# Altium PCB FIT_PM_Dual_Range_AFE.PcbDoc (part 14 of 17)
Units mm, origin at the board's own origin, x right, y up, seen from the top; angles counter-clockwise.
Board outline 259 x 114 mm, 8 copper layers (Top Layer, Mid-Layer 1, Mid-Layer 2, Layer 1, Layer 2, Mid-Layer 3, Mid-Layer 4, Bottom Layer), stack 1.616 mm thick; 963 components, 806 nets, 4757 pads, 2208 vias.
Unrouted connection lines stored in the file: 682.
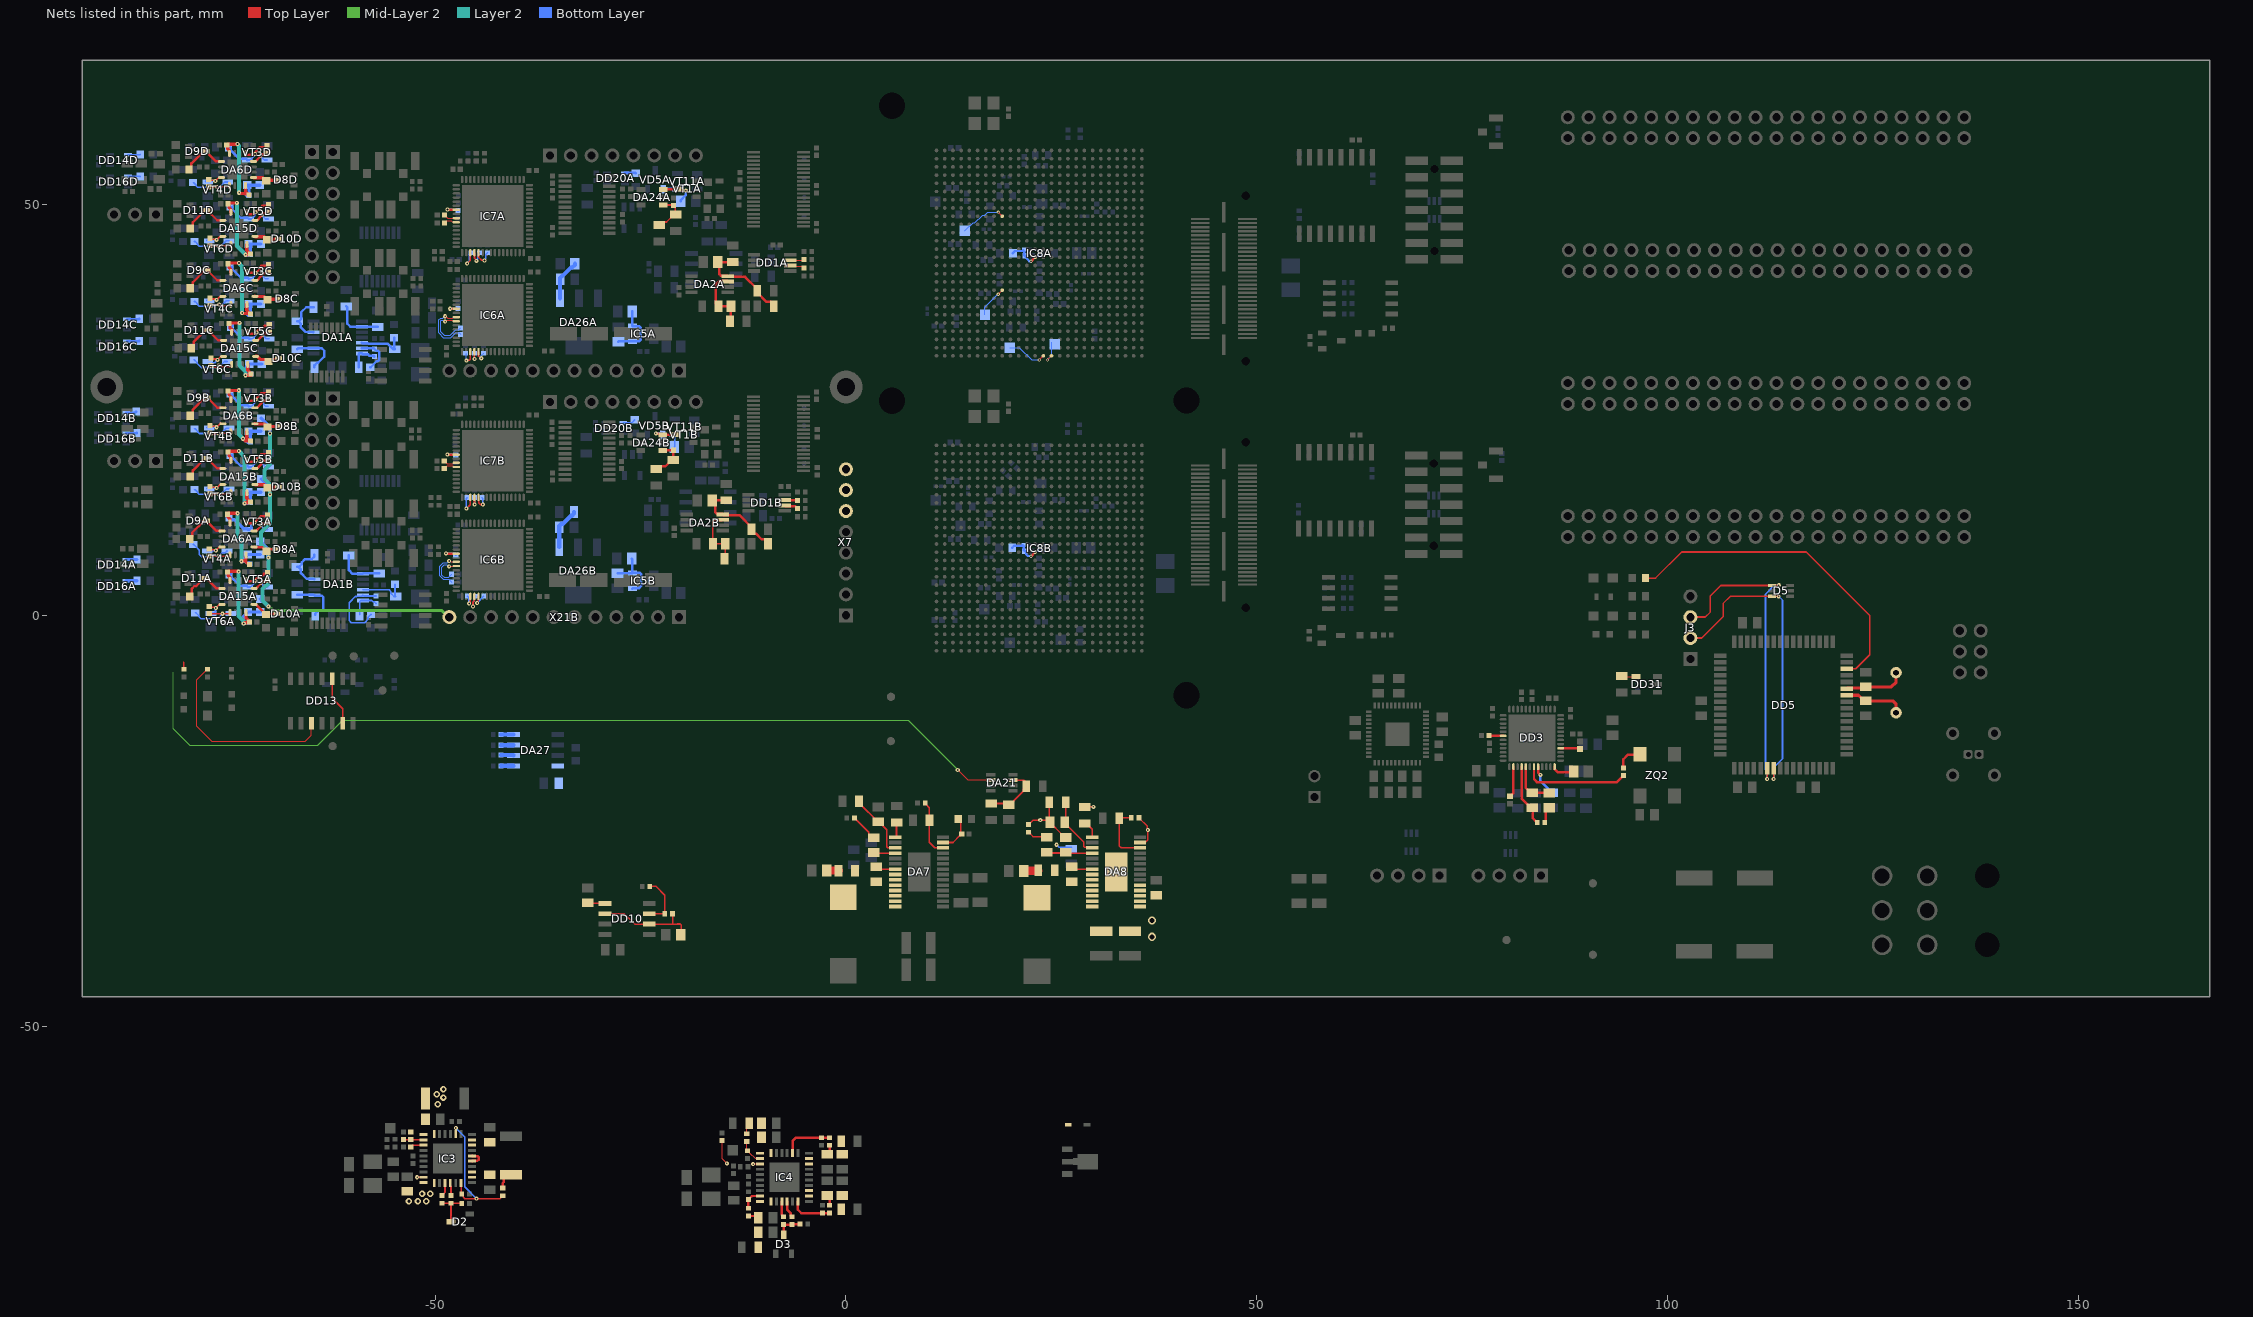
[diagram p16: the nets of this part, all layers, seen from the top]

## Via types
v1: diameter 0.5, hole 0.2, Top Layer to Bottom Layer, tented both sides, 1234 vias
v2: diameter 0.4, hole 0.2, Top Layer to Bottom Layer, tented both sides, 876 vias
v3: diameter 1, hole 0.6, Top Layer to Bottom Layer, tented both sides, 74 vias
v4: diameter 0.8, hole 0.4, Top Layer to Bottom Layer, tented both sides, 15 vias
v5: diameter 0.5, hole 0.2, Top Layer to Bottom Layer, 9 vias

## Nets (pads, with @x,y where several pads share a name; then routed paths per layer and width w, separated by ;. In a path a pad name is that pad's centre, name@x,y a point inside that pad or via, vN(x,y) a via of type N, cw(c..) or ccw(c..) an arc to the next point about the centre after c; other vN are vias at no path point) (continued)
LED_PSU_Fail: DD13.3 R113.1 | length 24
  Top Layer w0.15: R113.1@-77.697,-6.534 -77.932,-6.769 -77.937,-6.769 -78.997,-7.829 -78.997,-13.524 -77.197,-15.324 -65.797,-15.324 -65.067,-14.594 DD13.3@-65.067,-13.124
LED_PWRIN_OK: DA21.2 R114.1 | length 112.4
  Top Layer w0.15: v1(13.603,-18.824) 14.803,-20.024 17.595,-20.024 DA21.2@17.621,-20.051
  Top Layer w0.2: R114.1@-80.597,-6.674 R114.1@-80.597,-6.554 -80.597,-5.711 -80.593,-5.707
  Mid-Layer 2 w0.15: -81.897,-7.012 -81.897,-13.824 -79.897,-15.824 -64.276,-15.824 -61.247,-12.794 7.573,-12.794 v1(13.603,-18.824)
LED_SYS_FAIL: DD5.62 R146.1 | length 39.9
  Top Layer w0.2: R146.1@97.519,4.536 98.545,4.536 101.724,7.714 116.891,7.714 124.619,-0.014 124.619,-4.814 122.919,-6.514 DD5.62@121.819,-6.514
MCU_Console_Rx: D5.1 DD5.38 J3.3 | length 39.5
  Top Layer w0.2: J3.3@102.779,-0.225 102.801,-0.204 104.604,-0.204 105.219,0.411 105.219,2.386 106.469,3.636 D5.1@112.719,3.636 112.734,3.651 113.535,3.651 v1(113.55,3.666) ; v1(112.119,-19.914) DD5.38@112.119,-18.614
  Bottom Layer w0.2: v1(112.119,-19.914) 112.119,-19.014 111.919,-18.814 111.919,2.586 112.999,3.666 v1(113.55,3.666)
MCU_Console_Tx: D5.3 DD5.39 J3.2 | length 37.9
  Top Layer w0.2: J3.2@102.779,-2.765 104.168,-2.765 106.763,-0.17 106.763,1.43 107.669,2.336 D5.3@112.719,2.336 113.509,2.336 v1(113.519,2.326) ; v1@112.919,-19.814 DD5.39@112.919,-18.614
  Bottom Layer w0.2: v1(112.919,-19.914) 112.919,-18.514 113.986,-17.447 113.986,1.859 v1(113.519,2.326)
N5V0_CFDA: L26C.2 L26D.2 L30C.2 L30D.2 X21A.12 | length 55.3
  Mid-Layer 2 w0.4: v1(-70,30.1) -69.078,30.1 -68.928,29.95 -68.472,29.95 -68.322,30.1 -54.9,30.1 -54.58,29.78 X21A.12@-48.28,29.78
  Layer 2 w0.5: v1(-70.2,52.096) -70.2,48.7 -70.9,48 -70.9,46.9 -70.3,46.3 v1(-70.3,44.929) -70.3,41.3 -70.9,40.7 -70.9,39.3 -70.1,38.5 v1(-70.1,37.629) -70.1,34.1 -70.8,33.4 -70.8,32.2 -70,31.4 v1(-70,30.1)
  Bottom Layer w0.4: L26D.2@-71.368,53.968 -71.343,53.968 -70.2,52.825 v1@-70.2,52.1 ; L26C.2@-71.2,39.5 -71.175,39.5 -70.1,38.425 v1(-70.1,37.629) ; L30D.2@-71.2,46.8 -71.175,46.8 -70.3,45.925 v1(-70.3,44.929) ; L30C.2@-71.1,32.2 -71.075,32.2 -70,31.125 v1(-70,30.1)
N5V0_CFDA: L26A.2 L26B.2 L30A.2 L30B.2 X21B.12 | length 54
  Mid-Layer 2 w0.4: v1(-70.3,1.1) -69.794,0.594 -49.233,0.594 -48.419,-0.22 X21B.12@-48.28,-0.22
  Layer 2 w0.5: v1(-70.3,1.1) -71,1.8 -71,3.2 -70.3,3.9 v1(-70.3,7.025) -70.3,7.8 -71.2,8.7 -71.2,10.1 -70.1,11.2 v1(-70.1,14.729) -70.1,15.9 -70.8,16.6 -70.8,17.7 -70.1,18.4 v1(-70.1,22.129)
  Bottom Layer w0.4: L26A.2@-71.306,9 -71.281,9 -70.4,8.119 -70.4,7.125 v1(-70.3,7.025) ; L30A.2@-71.3,2 -71.275,2 -70.394,1.119 -70.319,1.119 v1(-70.3,1.1) ; L30B.2@-71.2,16.6 -71.175,16.6 -70.1,15.525 v1(-70.1,14.729) ; L26B.2@-71.2,24 -71.175,24 -70.1,22.925 v1(-70.1,22.129)
N5V0_CFDA1A: C91A.2 C138A.2 C291A.2 C306A.2 DA6A.4 DA6A.12 L26A.1 | length 13.8
  Top Layer w0.4: DA6A.4@-74.975,11.25 -74.975,11.697 -75.188,11.91 -75.188,11.956 -75.19,11.957 -75.19,12.19 C91A.2@-75.3,12.3 -75.19,12.41 -74.065,12.41 v1(-74.05,12.425) ; v1(-73.597,6.581) -73.578,6.6 -73.507,6.6 -73.482,6.625 -73.25,6.625 -73.025,6.85 DA6A.12@-73.025,7.125 ; -73.129,6.55 -73.072,6.55 -72.832,6.31 -72.71,6.31 C291A.2@-72.6,6.2
  Layer 2 w0.5: v1(-74.05,12.425) -74.05,9.35 -73.597,8.897 v1(-73.597,6.581)
  Bottom Layer w0.4: v1(-73.597,6.581) -73.57,6.581 -73.539,6.55 -73.072,6.55 -72.847,6.325 -72.65,6.325 C138A.2@-72.55,6.225 ; -73.231,6.619 -73.231,6.69 -73.202,6.719 -73.202,7.048 -72.85,7.4 L26A.1@-71.306,7.4
N5V0_CFDA1B: C91B.2 C138B.2 C291B.2 C306B.2 DA6B.4 DA6B.12 L26B.1 | length 14.7
  Top Layer w0.4: DA6B.4@-74.875,26.25 -74.875,26.606 -75.088,26.819 -75.088,26.956 -75.09,26.958 -75.09,27.19 C91B.2@-75.2,27.3 -75.119,27.381 -73.919,27.381 v1(-73.9,27.4) ; v1(-73.4,21.5) -73.153,21.253 C291B.2@-72.553,21.253 ; DA6B.12@-72.925,22.35 -72.925,21.625 C291B.2@-72.5,21.2
  Layer 2 w0.5: v1(-73.9,27.4) -73.9,22 v1(-73.4,21.5)
  Bottom Layer w0.4: v1(-73.4,21.5) -73.373,21.5 -73.123,21.25 -72.972,21.25 -72.751,21.029 C138B.2@-72.7,21.029 ; C306B.2@-72.725,22.4 -72.5,22.175 C138B.2@-72.5,21.129 ; C306B.2@-72.7,22.4 L26B.1@-71.2,22.4
N5V0_CFDA1C: C91C.2 C138C.2 C291C.2 C306C.2 DA6C.4 DA6C.12 L26C.1 | length 14.9
  Top Layer w0.4: DA6C.4@-74.875,41.75 -74.875,42.106 -75.088,42.319 -75.088,42.456 -75.09,42.458 -75.09,42.69 C91C.2@-75.2,42.8 -75.119,42.881 v1(-73.881,42.881) ; v1(-73.5,36.8) -73.473,36.8 -73.423,36.75 -72.55,36.75 C291C.2@-72.5,36.7 -72.925,37.125 DA6C.12@-72.925,37.85
  Layer 2 w0.5: v1(-73.881,42.881) -73.881,42.854 -73.5,42.473 v1(-73.5,36.8)
  Bottom Layer w0.4: v1(-73.5,36.8) -73.473,36.8 -73.423,36.75 -72.972,36.75 -72.751,36.529 C138C.2@-72.7,36.529 ; C306C.2@-72.725,37.9 -72.5,37.675 C138C.2@-72.5,36.629 ; C306C.2@-72.7,37.9 L26C.1@-71.2,37.9
N5V0_CFDA1D: C91D.2 C138D.2 C291D.2 C306D.2 DA6D.4 DA6D.12 L26D.1 | length 15.2
  Top Layer w0.4: DA6D.4@-75.043,56.218 -75.043,56.574 -75.256,56.787 -75.256,56.924 -75.258,56.926 -75.258,57.158 C91D.2@-75.368,57.268 -75.287,57.349 -74.087,57.349 v1(-74.068,57.368) ; v1(-73.86,51.44) -73.833,51.44 -73.743,51.35 -73.172,51.35 -73.1,51.278 -72.778,51.278 C291D.2@-72.668,51.168 -73.093,51.593 DA6D.12@-73.093,52.318
  Layer 2 w0.5: v1(-74.068,57.368) -74.068,57.341 -73.86,57.133 v1(-73.86,51.44)
  Bottom Layer w0.4: v1(-73.86,51.44) -73.833,51.44 -73.743,51.35 -73.172,51.35 -72.868,51.046 C138D.2@-72.868,50.996 ; C306D.2@-72.893,52.368 -72.668,52.143 C138D.2@-72.668,51.096 ; C306D.2@-72.868,52.368 L26D.1@-71.368,52.368
N5V0_CFDA2A: C93A.2 C140A.2 C287A.2 C310A.2 DA15A.4 DA15A.12 L30A.1 | length 15.2
  Top Layer w0.4: DA15A.4@-74.975,4.25 -74.975,4.606 -75.188,4.819 -75.188,4.956 -75.19,4.958 -75.19,5.19 C93A.2@-75.3,5.3 -75.219,5.381 -74.008,5.381 -73.953,5.326 v1(-73.926,5.326) ; v1(-73.3,-1) -73.273,-1 -73.183,-0.91 -72.71,-0.91 C287A.2@-72.6,-0.8 -73.025,-0.375 DA15A.12@-73.025,0.35
  Layer 2 w0.5: v1(-73.926,5.326) -73.926,-0.074 -73.319,-0.681 -73.319,-0.981 v1(-73.3,-1)
  Bottom Layer w0.4: C140A.2@-72.65,-0.8 -72.76,-0.91 -73.183,-0.91 -73.273,-1 v1(-73.3,-1) -73.3,-0.1 -73.1,0.1 -73.1,0.125 -72.825,0.4 C310A.2@-72.8,0.4 L30A.1@-71.3,0.4
N5V0_CFDA2B: C93B.2 C140B.2 C287B.2 C310B.2 DA15B.4 DA15B.12 L30B.1 | length 14.6
  Top Layer w0.4: DA15B.4@-74.875,18.85 -74.875,19.206 -75.088,19.419 -75.088,19.556 -75.09,19.558 -75.09,19.79 C287B.2@-75.2,19.9 -75.119,19.981 -73.919,19.981 v1(-73.9,20) ; v1(-73.2,13.629) -73.173,13.629 -73.107,13.695 -72.605,13.695 C93B.2@-72.5,13.8 -72.925,14.225 DA15B.12@-72.925,14.95
  Layer 2 w0.5: v1(-73.9,20) -73.2,19.3 v1(-73.2,13.629)
  Bottom Layer w0.4: v1(-73.2,13.629) C140B.2@-72.7,13.629 ; C310B.2@-72.725,15 -72.5,14.775 C140B.2@-72.5,13.729 ; C310B.2@-72.7,15 L30B.1@-71.2,15
N5V0_CFDA2C: C93C.2 C140C.2 C287C.2 C310C.2 DA15C.4 DA15C.12 L30C.1 | length 15.1
  Top Layer w0.4: DA15C.4@-74.775,34.45 -74.775,34.806 -74.988,35.019 -74.988,35.156 -74.99,35.158 -74.99,35.39 C93C.2@-75.1,35.5 -75.019,35.581 -73.819,35.581 v1(-73.8,35.6) ; v1(-73.091,29.23) C287C.2@-72.4,29.23 ; DA15C.12@-72.825,30.55 -72.825,29.825 C287C.2@-72.4,29.4
  Layer 2 w0.5: v1(-73.8,35.6) -73.8,30.4 -73.11,29.71 -73.11,29.249 v1(-73.091,29.23)
  Bottom Layer w0.4: C140C.2@-72.4,29.4 -72.51,29.29 -73.003,29.29 -73.064,29.23 v1(-73.091,29.23) -73.091,30.109 -72.925,30.275 -72.925,30.325 -72.65,30.6 C310C.2@-72.625,30.6 L30C.1@-71.1,30.6
N5V0_CFDA2D: C93D.2 C140D.2 C287D.2 C310D.2 DA15D.4 DA15D.12 L30D.1 | length 14.2
  Top Layer w0.4: DA15D.4@-74.875,49.05 -74.875,49.406 -75.088,49.619 -75.088,49.756 -75.09,49.758 -75.09,49.99 C93D.2@-75.2,50.1 -75.119,50.181 -74.166,50.181 v1(-74.147,50.2) ; v1(-73.081,43.895) -72.605,43.895 C287D.2@-72.5,44 -72.925,44.425 DA15D.12@-72.925,45.15
  Layer 2 w0.5: v1(-74.147,50.2) -74.147,44.962 v1(-73.081,43.895)
  Bottom Layer w0.4: v1(-73.081,43.895) -73.053,43.895 -72.987,43.829 C140D.2@-72.7,43.829 ; C310D.2@-72.725,45.2 -72.5,44.975 C140D.2@-72.5,43.929 ; C310D.2@-72.7,45.2 L30D.1@-71.2,45.2
N5V5: C136.2 C145.2 C146.2 C149.1 C150.1 C151.1 DA8.1 DA8.2 DA8.3 DA8.4 DA8.5 DA8.13 DA8.29 R68.1 R69.1 R70.1 R72.1 X7.6 X7.7 X7.8 | length 15.3
  Top Layer w0.2: R69.1@22.22,-25.457 22.24,-25.457 22.768,-24.929 v1(23.644,-24.929) 24.544,-24.929 26.544,-26.929 C150.1@26.744,-26.929 ; C151.1@24.744,-25.029 R68.1@24.744,-22.729 ; R72.1@29.044,-23.329 29.06,-23.312 v1(30.111,-23.312) ; DA8.13@35.644,-27.649 DA8.13@35.794,-27.649 36.444,-27.649 36.744,-27.349 v1(36.744,-26.129) 36.691,-26.075 36.691,-25.675 35.675,-24.659 R70.1@35.675,-24.639
  Bottom Layer w0.2: v1(25.644,-27.929) 25.964,-28.249 C149.1@27.444,-28.249
  other v3: 37.244,-39.129 37.244,-37.129
NetC1A_2: C1A.2 DA2A.3 R2A.2 R9A.2 | length 7.8
  Top Layer w0.3: DA2A.3@-14.4,40.625 -14.475,40.7 -15.4,40.7 -15.825,40.275 -15.825,37.925 R2A.2@-15.5,37.6 C1A.2@-14,37.6 -14,35.9 R9A.2@-14.1,35.8
NetC1B_2: C1B.2 DA2B.3 R2B.2 R9B.2 | length 7.3
  Top Layer w0.2: DA2B.3@-15,11.625 -15.125,11.5 -16.083,11.5 -16.2,11.383 R2B.2@-16.2,8.7 C1B.2@-14.7,8.7 -14.7,7 R9B.2@-14.8,6.9
NetC3A_2: C3A.2 IC6A.23 | length 1.7
  Top Layer w0.3: v1(-48.188,37.312) -48.181,37.306 IC6A.23@-47.427,37.306
  Bottom Layer w0.3: v1(-48.188,37.312) -48.182,37.318 -47.244,37.318 C3A.2@-47.226,37.335
NetC3B_2: C3B.2 IC6B.23 | length 2.5
  Top Layer w0.3: v1(-48.683,7.543) -48.646,7.506 IC6B.23@-47.427,7.506
  Bottom Layer w0.3: v1(-48.683,7.543) -48.645,7.505 -47.655,7.505 C3B.2@-47.5,7.35
NetC5A_2: C5A.2 IC6A.25 | length 7.3
  Top Layer w0.15: v1(-48.793,36.409) -48.698,36.409 -48.468,36.179 -47.89,36.179 -47.763,36.306 IC6A.25@-47.427,36.306
  Bottom Layer w0.15: v1(-48.793,36.409) -48.836,36.409 -49.055,36.19 -49.341,36.19 -49.576,35.954 -49.576,34.376 -49,33.8 -48.097,33.8 -47.497,34.4 -47.1,34.4 C5A.2@-46.9,34.2
NetC5B_2: C5B.2 IC6B.25 | length 5.2
  Top Layer w0.15: v1(-48.301,6.614) -48.206,6.614 -48.127,6.535 -47.456,6.535 IC6B.25@-47.427,6.506
  Bottom Layer w0.145: v1(-48.301,6.614) -48.367,6.614 -48.563,6.418 -48.991,6.418 -49.429,5.98 -49.429,4.8 -49.02,4.391 -48.326,4.391 C5B.2@-47.993,4.057
NetC6_1: C6.1 ZQ2.3 | length 3.2
  Top Layer w0.3: C6.1@94.664,-18.393 94.62,-18.349 94.62,-17.51 95.143,-16.988 96.576,-16.988 ZQ2.3@96.668,-16.895
NetC6_2: C6.2 DD3.43 | length 12.9
  Top Layer w0.3: DD3.43@83.749,-18.421 83.749,-19.944 84.096,-20.291 93.844,-20.291 C6.2@94.639,-19.495
NetC7A_2: C7A.2 IC6A.26 | length 6.4
  Top Layer w0.15: v1(-48.793,35.757) -48.698,35.757 -48.534,35.92 -47.883,35.92 -47.768,35.806 IC6A.26@-47.427,35.806
  Bottom Layer w0.15: v1(-48.793,35.757) -48.873,35.757 -49.055,35.939 -49.238,35.939 -49.326,35.851 -49.326,34.538 -48.888,34.1 -48.15,34.1 -47.485,34.765 -47.135,34.765 C7A.2@-46.9,35
NetC7B_2: C7B.2 IC6B.26 | length 4.4
  Top Layer w0.15: v1(-48.301,5.962) -48.279,5.984 -47.45,5.984 IC6B.26@-47.427,6.006
  Bottom Layer w0.145: v1(-48.301,5.962) -48.38,5.962 -48.573,6.155 -48.888,6.155 -49.181,5.862 -49.181,4.898 -48.919,4.636 -48.358,4.636 -48.237,4.757 -48.237,4.763 -48.006,4.994 C7B.2@-48,4.994
NetC12_2: C12.2 DD10.2 DD10.6 R66.1 | length 12.1
  Top Layer w0.2: DD10.6@-29.141,-36.311 -26.991,-36.311 -25.721,-37.581 -24.141,-37.581 -21.086,-37.581 ; R66.1@-21.086,-36.275 -21.086,-37.581 ; -20.555,-37.581 -21.086,-37.581 ; -20.555,-37.578 -20.158,-37.578 -20.041,-37.695 C12.2@-20.041,-38.841
NetC21_2: C21.2 C22.2 IC3.8 IC3.9 IC3.14 IC3.15 R37.1 R40.2 | length 2.3
  Top Layer w0.3: R40.2@-41.781,-69.714 -41.781,-69.114 -41.63,-68.963 -41.63,-68.539 -41.205,-68.114 R37.1@-40.781,-68.114
NetC23_2: C23.2 C29.2 IC3.1 IC3.22 IC3.23 IC3.32 R52.1 R56.2
  other v4: -53.2,-71.3 -52.1,-71.3 -51.1,-71.3 -51.6,-70.4 -50.6,-70.4 -49.7,-59.5 -49,-58.7 -49.8,-58.3 -49,-57.7
NetC24_2: C24.2 DD3.48 | length 2.8
  Top Layer w0.3: DD3.48@86.249,-18.421 86.249,-18.696 86.674,-19.121 C24.2@88.575,-19.121
NetC25_2: C25.2 DD3.38 | length 3.8
  Top Layer w0.3: C25.2@80.819,-22.062 80.819,-22.015 81.022,-21.812 81.069,-21.812 81.249,-21.632 DD3.38@81.249,-18.421
NetC26_2: C26.2 DD3.4 | length 2.4
  Top Layer w0.3: DD3.4@86.999,-16.171 C26.2@89.384,-16.171
NetC27_1: C27.1 C28.1 DD3.41 | length 5.7
  Top Layer w0.3: DD3.41@82.749,-18.421 82.749,-21.003 82.965,-21.219 82.965,-21.226 83.34,-21.601 C28.1@83.515,-21.601 85.579,-21.601 C27.1@85.604,-21.626
NetC27_2: C27.2 R27.1 | length 1.8
  Top Layer w0.3: R27.1@85.182,-25.057 85.182,-23.849 C27.2@85.604,-23.426
NetC28_2: C28.2 DD3.40 R27.2 | length 7.7
  Top Layer w0.3: DD3.40@82.249,-18.421 82.249,-22.31 83.34,-23.401 C28.2@83.515,-23.401 83.591,-23.477 83.591,-24.679 83.986,-25.073 83.988,-25.073 84.128,-25.213 R27.2@84.128,-25.233
NetC43_2: C43.2 DD3.44 | length 4
  Top Layer w0.3: DD3.44@84.249,-18.421 84.249,-19.144 v1(84.519,-19.414)
  Bottom Layer w0.3: v1(84.519,-19.414) 84.519,-20.142 85.444,-21.067 85.444,-21.242 85.819,-21.617 C43.2@85.994,-21.617
NetC44_2: C44.2 IC3.25 | length 1.6
  Top Layer w0.2: C44.2@-52.981,-64.714 -52.756,-64.489 IC3.25@-51.44,-64.489
NetC46A_1: C46A.1 DA6A.1 R13A.2 VT3A.3 | length 7.4
  Top Layer w0.3: DA6A.1@-73.025,11.252 -73.025,11.223 -73.002,11.2 -72.154,11.2 -72.054,11.3 v1(-72,11.3) -71.26,12.04 -70.56,12.04 C46A.1@-70.4,12.2
  Bottom Layer w0.4: R13A.2@-75.1,11.9 -75.1,11.851 -74.875,11.626 -74.401,11.626 -73.325,10.55 -72.9,10.55 VT3A.3@-72.8,10.45 -72.45,10.45 -72.35,10.55 -72.35,10.95 v1(-72,11.3)
NetC46A_2: C46A.2 DA6A.16 VT3A.2 | length 3.2
  Top Layer w0.3: DA6A.16@-72.05,10.275 -71.814,10.275 -71.238,10.85 -71.238,10.962 v1(-71.2,11) -71.146,11 -71.006,11.14 -70.56,11.14 C46A.2@-70.4,11.3
  Bottom Layer w0.2: v1(-71.2,11) -71.2,10.9 -70.75,10.45 VT3A.2@-70.4,10.45
NetC46B_1: C46B.1 DA6B.1 R13B.2 VT3B.3 | length 7.6
  Top Layer w0.3: DA6B.1@-72.925,26.252 -72.925,26.163 -72.902,26.14 -72.008,26.14 -71.897,26.251 v1(-71.843,26.251) ; v1@-71.896,26.304 -71.16,27.04 -70.46,27.04 C46B.1@-70.3,27.2
  Bottom Layer w0.2: VT3B.3@-72.7,25.45 -72.35,25.45 -71.9,25.9 -71.9,26.194 v1(-71.843,26.251)
  Bottom Layer w0.3: R13B.2@-75,27 -75,26.925 -73.675,25.6 -72.85,25.6 VT3B.3@-72.7,25.45 ; R13B.2@-74.725,26.85 R13B.2@-74.725,26.925
NetC46B_2: C46B.2 DA6B.16 VT3B.2 | length 3
  Top Layer w0.3: DA6B.16@-71.714,25.275 -71.062,25.926 -71.062,26.092 v1(-71.024,26.13) ; v1@-70.926,26.14 -70.46,26.14 C46B.2@-70.3,26.3
  Bottom Layer w0.2: v1(-71.024,26.13) -71.024,26.049 -70.85,25.875 -70.85,25.65 -70.65,25.45 VT3B.2@-70.3,25.45
NetC46C_1: C46C.1 DA6C.1 R13C.2 VT3C.3 | length 7.6
  Top Layer w0.3: DA6C.1@-72.925,41.75 -72.925,41.723 -72.902,41.7 -71.871,41.7 v1(-71.833,41.663) ; v1@-71.882,41.711 -71.785,41.711 -71.371,42.125 -71.371,42.329 -71.16,42.54 -70.46,42.54 C46C.1@-70.3,42.7
  Bottom Layer w0.2: VT3C.3@-72.7,40.95 -72.35,40.95 -71.891,41.409 -71.891,41.605 v1(-71.833,41.663)
  Bottom Layer w0.3: R13C.2@-75,42.5 -75,42.425 -73.675,41.1 -72.85,41.1 VT3C.3@-72.7,40.95 ; R13C.2@-74.725,42.35 R13C.2@-74.725,42.425
NetC46C_2: C46C.2 DA6C.16 VT3C.2 | length 3.1
  Top Layer w0.3: DA6C.16@-71.714,40.775 -71.134,41.355 -71.134,41.549 v1(-71.095,41.588) ; v1@-71.095,41.584 -71.041,41.584 -70.986,41.64 -70.46,41.64 C46C.2@-70.3,41.8
  Bottom Layer w0.2: v1(-71.095,41.588) -71.038,41.53 -71.038,41.338 -70.65,40.95 VT3C.2@-70.3,40.95
NetC46D_1: C46D.1 DA6D.1 R13D.2 VT3D.3 | length 7.8
  Top Layer w0.3: DA6D.1@-73.093,56.218 -73.093,56.063 -73.07,56.04 -72.11,56.04 -71.99,56.16 v1(-71.936,56.16) ; v1@-72.005,56.228 -71.73,56.503 -71.73,56.606 -71.328,57.008 -70.628,57.008 C46D.1@-70.468,57.168
  Bottom Layer w0.2: VT3D.3@-72.868,55.418 -72.518,55.418 -71.993,55.943 -71.993,56.102 v1(-71.936,56.16)
  Bottom Layer w0.3: R13D.2@-75.168,56.968 -75.168,56.893 -73.843,55.568 -73.018,55.568 VT3D.3@-72.868,55.418 ; R13D.2@-74.893,56.818 R13D.2@-74.893,56.893
NetC46D_2: C46D.2 DA6D.16 VT3D.2 | length 3.2
  Top Layer w0.3: DA6D.16@-72.118,55.243 -71.881,55.243 -71.306,55.818 -71.306,55.93 v1(-71.268,55.968) -71.214,55.968 -71.074,56.108 -70.628,56.108 C46D.2@-70.468,56.268
  Bottom Layer w0.2: v1(-71.268,55.968) -71.268,55.868 -70.818,55.418 VT3D.2@-70.468,55.418
NetC50A_2: C50A.2 IC7A.23 | length 2.4
  Top Layer w0.3: v1(-48.5,49.4) -48.456,49.356 IC7A.23@-47.427,49.356
  Bottom Layer w0.3: v1(-48.5,49.4) -48.462,49.362 -47.321,49.362 C50A.2@-47.226,49.267
NetC50B_2: C50B.2 IC7B.23 | length 2.1
  Top Layer w0.3: v1(-48.517,19.577) -48.496,19.556 IC7B.23@-47.427,19.556
  Bottom Layer w0.3: v1(-48.517,19.577) -48.496,19.556 -47.556,19.556 C50B.2@-47.5,19.5
NetC51A_2: C51A.2 IC7A.25 | length 1.6
  Top Layer w0.15: C51A.2@-48.85,48.711 -48.445,48.306 -47.818,48.306 -47.768,48.356 IC7A.25@-47.427,48.356
NetC51B_2: C51B.2 IC7B.25 | length 1.7
  Top Layer w0.15: C51B.2@-48.9,18.8 -48.537,18.437 -47.887,18.437 -47.768,18.556 IC7B.25@-47.427,18.556
NetC52A_1: C52A.1 DA6A.9 R19A.2 VT4A.3 | length 8
  Top Layer w0.2: C52A.1@-77.5,7.2 C52A.1@-77.5,7.2 v1(-76.394,7.199) ; v1@-76.393,7.182 -75.044,7.182 -74.975,7.252 DA6A.9@-74.975,7.35
  Bottom Layer w0.2: R19A.2@-79.45,8.625 -79.375,8.625 -79.05,8.3 -79.05,8.274 -78.707,7.931 -78.707,7.399 -78.433,7.125 -77.051,7.125 -76.986,7.19 -76.403,7.19 v1(-76.394,7.199) ; v1@-76.382,7.171 -75.928,7.625 -75.55,7.625 VT4A.3@-75.35,7.825
NetC52A_2: C52A.2 DA6A.8 VT4A.2 | length 3
  Top Layer w0.2: C52A.2@-77.5,8.1 -77.4,8 -76.8,8 v1(-76.7,7.9) -76.195,8.405 -76.195,8.394 -76.126,8.325 DA6A.8@-75.95,8.325
  Bottom Layer w0.2: VT4A.2@-77.75,7.825 -77.675,7.9 v1(-76.7,7.9)
NetC52B_1: C52B.1 DA6B.9 R19B.2 VT4B.3 | length 7.5
  Top Layer w0.2: C52B.1@-77.4,22.2 -77.329,22.129 v1(-76.4,22.129) -76.343,22.186 -74.944,22.186 -74.875,22.255 DA6B.9@-74.875,22.35
  Bottom Layer w0.2: R19B.2@-79.3,22.7 -79.225,22.7 -78.9,22.375 -78.9,22.3 -78.729,22.129 v1(-76.4,22.129) -76.343,22.186 -76.043,22.186 -75.45,22.779 VT4B.3@-75.1,22.779
NetC52B_2: C52B.2 DA6B.8 VT4B.2 | length 3.1
  Top Layer w0.2: C52B.2@-77.4,23.1 -77.3,23 -76.7,23 v1(-76.6,22.9) -76.095,23.405 -76.095,23.394 -76.026,23.325 DA6B.8@-75.85,23.325
  Bottom Layer w0.2: VT4B.2@-77.8,22.829 -77.729,22.9 v1(-76.6,22.9)
NetC52C_1: C52C.1 DA6C.9 R19C.2 VT4C.3 | length 7.8
  Top Layer w0.2: C52C.1@-77.4,37.7 -77.285,37.815 -76.414,37.815 v1@-76.285,37.686 ; v1(-76.285,37.815) v1@-76.285,37.686 ; DA6C.9@-74.875,37.85 -74.875,37.755 -74.944,37.686 v1@-76.285,37.686
  Bottom Layer w0.2: R19C.2@-79.3,38.2 -79.225,38.2 -78.9,37.875 -78.9,37.8 -78.729,37.629 -76.935,37.629 -76.785,37.779 -76.378,37.779 v1@-76.285,37.686 ; v1(-76.285,37.815) v1@-76.285,37.686 ; VT4C.3@-75.1,38.279 -75.45,38.279 -76.043,37.686 v1@-76.285,37.686
NetC52C_2: C52C.2 DA6C.8 VT4C.2 | length 3.1
  Top Layer w0.2: C52C.2@-77.4,38.6 -77.3,38.5 -76.7,38.5 v1(-76.6,38.4) -76.095,38.905 -76.095,38.894 -76.026,38.825 DA6C.8@-75.85,38.825
  Bottom Layer w0.2: VT4C.2@-77.8,38.329 -77.729,38.4 v1(-76.6,38.4)
NetC52D_1: C52D.1 DA6D.9 R19D.2 VT4D.3 | length 7.4
  Top Layer w0.2: C52D.1@-77.568,52.168 -77.496,52.096 -77.453,52.14 v1(-76.551,52.14) ; v1@-76.538,52.127 -76.511,52.154 -75.112,52.154 -75.043,52.223 DA6D.9@-75.043,52.318
  Bottom Layer w0.2: R19D.2@-79.468,52.668 -79.393,52.668 -79.068,52.343 -79.068,52.268 -78.896,52.096 -76.594,52.096 v1(-76.551,52.14) ; v1@-76.538,52.127 -76.511,52.154 -76.211,52.154 -75.618,52.746 VT4D.3@-75.268,52.746
NetC52D_2: C52D.2 DA6D.8 VT4D.2 | length 3.1
  Top Layer w0.2: C52D.2@-77.568,53.068 -77.468,52.968 -76.868,52.968 v1(-76.768,52.868) -76.263,53.373 -76.263,53.362 -76.194,53.293 DA6D.8@-76.018,53.293
  Bottom Layer w0.2: VT4D.2@-77.968,52.796 -77.896,52.868 v1(-76.768,52.868)
NetC53A_2: C53A.2 IC7A.26 | length 1.6
  Top Layer w0.15: C53A.2@-48.85,47.762 -48.569,48.043 -48.057,48.043 -47.898,47.885 -47.456,47.885 IC7A.26@-47.427,47.856
NetC53B_2: C53B.2 IC7B.26 | length 1.7
  Top Layer w0.15: C53B.2@-48.9,17.851 -48.564,18.187 -47.89,18.187 -47.759,18.056 IC7B.26@-47.427,18.056
NetC57A_1: C57A.1 DA15A.1 R33A.2 VT5A.3 | length 7.6
  Top Layer w0.3: DA15A.1@-73.025,4.25 -73.025,4.163 -73.002,4.14 -72.007,4.14 -71.957,4.19 v1(-71.903,4.19) ; v1@-71.973,4.26 -71.733,4.5 -71.393,4.5 -70.853,5.04 -70.56,5.04 C57A.1@-70.4,5.2
  Bottom Layer w0.2: VT5A.3@-72.8,3.45 -72.45,3.45 -71.96,3.94 -71.96,4.133 v1(-71.903,4.19)
  Bottom Layer w0.3: R33A.2@-75.1,5 -75.1,4.925 -73.775,3.6 -72.95,3.6 VT5A.3@-72.8,3.45 ; R33A.2@-74.825,5.05 R33A.2@-74.825,5.125
NetC57A_2: C57A.2 DA15A.16 VT5A.2 | length 3.2
  Top Layer w0.3: DA15A.16@-72.05,3.275 -71.814,3.275 -71.238,3.85 -71.238,3.962 v1(-71.2,4) -71.146,4 -71.006,4.14 -70.56,4.14 C57A.2@-70.4,4.3
  Bottom Layer w0.2: v1(-71.2,4) -71.2,3.9 -70.75,3.45 VT5A.2@-70.4,3.45
NetC57B_1: C57B.1 DA15B.1 R33B.2 VT5B.3 | length 7.7
  Top Layer w0.3: DA15B.1@-72.925,18.852 -72.925,18.723 -72.902,18.7 -72.014,18.7 -71.874,18.84 v1(-71.82,18.84) ; v1@-71.886,18.906 -71.886,18.914 -71.16,19.64 -70.46,19.64 C57B.1@-70.3,19.8
  Bottom Layer w0.2: VT5B.3@-72.7,18.05 -72.35,18.05 -71.877,18.523 -71.877,18.783 v1(-71.82,18.84)
  Bottom Layer w0.3: R33B.2@-75,19.6 R33B.2@-75,19.525 -73.675,18.2 -72.85,18.2 VT5B.3@-72.7,18.05 ; R33B.2@-74.725,19.45 R33B.2@-74.725,19.525
NetC57B_2: C57B.2 DA15B.16 VT5B.2 | length 3.3
  Top Layer w0.3: DA15B.16@-71.714,17.875 -71.16,18.428 -71.16,18.726 -71.084,18.803 -70.397,18.803 C57B.2@-70.3,18.9
  Bottom Layer w0.2: v1(-71.122,18.765) -71.065,18.707 -71.065,18.465 -70.65,18.05 VT5B.2@-70.3,18.05
NetC57C_1: C57C.1 DA15C.1 R33C.2 VT5C.3 | length 7.7
  Top Layer w0.3: DA15C.1@-72.825,34.45 -72.825,34.323 -72.802,34.3 -71.914,34.3 -71.774,34.44 v1(-71.72,34.44) ; v1@-71.786,34.506 -71.786,34.514 -71.337,34.963 -71.055,34.963 -70.778,35.24 -70.36,35.24 C57C.1@-70.2,35.4
  Bottom Layer w0.2: VT5C.3@-72.6,33.65 -72.25,33.65 -71.777,34.123 -71.777,34.383 v1(-71.72,34.44)
  Bottom Layer w0.3: R33C.2@-74.9,35.2 R33C.2@-74.9,35.125 -73.575,33.8 -72.75,33.8 VT5C.3@-72.6,33.65 ; R33C.2@-74.625,35.25 R33C.2@-74.625,35.325
NetC57C_2: C57C.2 DA15C.16 VT5C.2 | length 3.2
  Top Layer w0.3: DA15C.16@-71.85,33.475 -71.614,33.475 -71.038,34.05 -71.038,34.162 v1(-71,34.2) -70.946,34.2 -70.806,34.34 -70.36,34.34 C57C.2@-70.2,34.5
  Bottom Layer w0.2: v1(-71,34.2) -71,34.1 -70.55,33.65 VT5C.2@-70.2,33.65
NetC57D_1: C57D.1 DA15D.1 R33D.2 VT5D.3 | length 7.8
  Top Layer w0.3: DA15D.1@-72.925,49.05 -72.925,48.823 -72.902,48.8 -72.174,48.8 -71.897,49.077 v1(-71.843,49.077) ; v1@-71.883,49.117 -71.881,49.115 -71.751,49.115 -71.026,49.84 -70.46,49.84 C57D.1@-70.3,50
  Bottom Layer w0.2: VT5D.3@-72.7,48.25 -72.35,48.25 -71.9,48.7 -71.9,49.02 v1(-71.843,49.077)
  Bottom Layer w0.3: R33D.2@-75,49.8 -75,49.725 -74.825,49.55 -73.675,48.4 -72.85,48.4 VT5D.3@-72.7,48.25 ; R33D.2@-74.725,49.65 R33D.2@-74.725,49.725
NetC57D_2: C57D.2 DA15D.16 VT5D.2 | length 3.2
  Top Layer w0.3: DA15D.16@-71.95,48.075 -71.714,48.075 -71.138,48.65 -71.138,48.762 v1(-71.1,48.8) -71.046,48.8 -70.906,48.94 -70.46,48.94 C57D.2@-70.3,49.1
  Bottom Layer w0.2: v1(-71.1,48.8) -71.1,48.7 -70.65,48.25 VT5D.2@-70.3,48.25
NetC66A_1: C66A.1 DA15A.9 R38A.2 VT6A.3 | length 7.5
  Top Layer w0.2: C66A.1@-77.5,0.2 v1(-75.9,0.2) -75.044,0.2 -74.975,0.269 DA15A.9@-74.975,0.35
  Bottom Layer w0.2: R38A.2@-79.2,0.3 -79.125,0.3 -78.8,-0.025 -78.8,-0.1 -78.5,-0.4 -76.5,-0.4 v1(-75.9,0.2) -74.95,0.2 VT6A.3@-74.9,0.25
NetC66A_2: C66A.2 DA15A.8 VT6A.2 | length 3
  Top Layer w0.2: C66A.2@-77.5,1.1 -77.4,1 -76.8,1 v1(-76.7,0.9) -76.195,1.405 -76.195,1.394 -76.126,1.325 DA15A.8@-75.95,1.325
  Bottom Layer w0.2: VT6A.2@-77.3,0.25 -76.95,0.25 -76.75,0.45 -76.75,0.85 v1(-76.7,0.9)
NetC66B_1: C66B.1 DA15B.9 R38B.2 VT6B.3 | length 7.4
  Top Layer w0.2: C66B.1@-77.4,14.8 -77.329,14.729 -77.299,14.758 v1(-76.389,14.758) ; v1@-76.379,14.749 -76.343,14.786 -74.944,14.786 -74.875,14.855 DA15B.9@-74.875,14.95
  Bottom Layer w0.2: R38B.2@-79.3,15.3 -79.225,15.3 -78.9,14.975 -78.9,14.9 -78.729,14.729 -76.419,14.729 v1(-76.389,14.758) ; v1@-76.379,14.749 -76.343,14.786 -76.043,14.786 -75.45,15.379 VT6B.3@-75.1,15.379
NetC66B_2: C66B.2 DA15B.8 VT6B.2 | length 3.1
  Top Layer w0.2: C66B.2@-77.4,15.7 -77.3,15.6 -76.7,15.6 v1(-76.6,15.5) -76.095,16.005 -76.095,15.994 -76.026,15.925 DA15B.8@-75.85,15.925
  Bottom Layer w0.2: VT6B.2@-77.8,15.429 -77.729,15.5 v1(-76.6,15.5)
NetC66C_1: C66C.1 DA15C.9 R38C.2 VT6C.3 | length 8.1
  Top Layer w0.2: C66C.1@-77.3,30.4 -77.1,30.2 -76.4,30.2 -76.319,30.2 v1@-76.259,30.259 ; v1(-76.4,30.4) v1@-76.259,30.259 ; DA15C.9@-74.775,30.55 -74.775,30.341 -74.844,30.271 -76.248,30.271 v1@-76.259,30.259
  Bottom Layer w0.2: R38C.2@-79.4,31.1 -79.325,31.1 -79,30.775 -79,30.7 -78.472,30.172 -76.428,30.172 -76.4,30.2 -76.35,30.2 v1@-76.275,30.275 ; v1(-76.4,30.4) v1@-76.275,30.275 ; VT6C.3@-75.3,30.9 -75.65,30.9 v1@-76.275,30.275
NetC66C_2: C66C.2 DA15C.8 VT6C.2 | length 2.6
  Top Layer w0.2: C66C.2@-77.3,31.3 -77.2,31.2 -76.6,31.2 v1(-76.5,31.1) -75.995,31.605 -75.995,31.594 -75.926,31.525 DA15C.8@-75.75,31.525
  Bottom Layer w0.2: VT6C.2@-77.1,30.7 -77.04,30.76 -76.84,30.76 v1(-76.5,31.1)
NetC66D_1: C66D.1 DA15D.9 R38D.2 VT6D.3 | length 7.5
  Top Layer w0.2: C66D.1@-77.4,45 -77.329,44.929 v1(-76.4,44.929) -76.343,44.986 -74.944,44.986 -74.875,45.055 DA15D.9@-74.875,45.15
  Bottom Layer w0.2: R38D.2@-79.3,45.5 -79.225,45.5 -78.9,45.175 -78.9,45.1 -78.729,44.929 v1(-76.4,44.929) -76.343,44.986 -76.043,44.986 -75.45,45.579 VT6D.3@-75.1,45.579
NetC66D_2: C66D.2 DA15D.8 VT6D.2 | length 3.1
  Top Layer w0.2: C66D.2@-77.4,45.9 -77.3,45.8 -76.7,45.8 v1(-76.6,45.7) -76.095,46.205 -76.095,46.194 -76.026,46.125 DA15D.8@-75.85,46.125
  Bottom Layer w0.2: VT6D.2@-77.8,45.629 -77.729,45.7 v1(-76.6,45.7)
NetC67A_2: C67A.2 IC5A.1 IC5A.3 L2A.2 | length 7.1
  Bottom Layer w0.3: C67A.2@-27.7,33.3 -27.65,33.35 IC5A.1@-26,33.35 -25.176,33.35 -25,33.526 -25,35.024 -25.176,35.2 -25.95,35.2 IC5A.3@-26,35.25 L2A.2@-26,37
NetC67B_2: C67B.2 IC5B.1 IC5B.3 L2B.2 | length 7.5
  Bottom Layer w0.3: C67B.2@-27.8,5.1 -27.75,5.15 IC5B.3@-26,5.15 ; L2B.2@-26.1,6.9 -26,6.8 IC5B.3@-26,5.15 ; IC5B.1@-26,3.25 -25.932,3.318 -25.182,3.318 -24.9,3.6 -24.9,5 -25.1,5.2 -25.95,5.2 IC5B.3@-26,5.15
NetC68_2: C68.2 C69.2 IC4.14 IC4.15 R84.1 R85.2 | length 1.2
  Top Layer w0.3: C68.2@-2.281,-65.614 -1.981,-65.314 R85.2@-1.981,-64.514
NetC70_2: C70.2 C71.2 IC4.8 IC4.9 R87.1 R88.2 | length 1.3
  Top Layer w0.3: C70.2@-2.281,-70.614 -1.981,-70.914 R88.2@-1.981,-71.814
NetC72_2: C72.2 C73.2 IC4.1 IC4.32 R92.1 R93.2 | length 1.3
  Top Layer w0.3: R93.2@-11.881,-73.114 -10.881,-73.114 C73.2@-10.681,-73.314
NetC75_2: C75.2 C76.2 IC4.22 IC4.23 R95.1 R96.2 | length 1.4
  Top Layer w0.15: R96.2@-12.081,-63.114 -12.081,-62.114 R95.1@-11.781,-61.814
NetC77_2: C77.2 IC4.25 | length 3.9
  Top Layer w0.15: C77.2@-15.081,-63.914 -15.081,-66.119 v1(-14.5,-66.7) ; v1(-11.3,-66.8) -11.277,-66.777 IC4.25@-10.444,-66.777
NetC79A_2: C79A.2 DA24A.3 VD5A.1 VT1A.3 VT11A.3 | length 7.3
  Top Layer w0.3: DA24A.3@-22.25,51.85 -22.225,51.875 -20.525,51.875 VT1A.3@-20.5,51.9 -20.35,51.75 -19.612,51.75 -19.554,51.692 v1(-19.5,51.692)
  Bottom Layer w0.3: VD5A.1@-22.25,51.85 -22.2,51.9 VT11A.3@-20.5,51.9 -20.35,51.75 -19.612,51.75 -19.554,51.692 v1(-19.5,51.692) -19.508,51.684 -19.508,51.142 -20.1,50.55 C79A.2@-20.1,50.4
NetC79B_2: C79B.2 DA24B.3 VD5B.1 VT1B.3 VT11B.3 | length 6.3
  Top Layer w0.3: v1(-23.138,22.145) -23.084,22.145 -23.039,22.1 -22.45,22.1 DA24B.3@-22.3,21.95 -22.275,21.975 -20.875,21.975 VT1B.3@-20.85,22
  Bottom Layer w0.2: VD5B.1@-22.3,21.95 -20.9,21.95 VT11B.3@-20.85,22 -20.85,20.55 C79B.2@-20.9,20.5
  Bottom Layer w0.3: v1(-23.138,22.145) -22.475,22.145 -22.3,21.97 VD5B.1@-22.3,21.95
NetC82A_2: C82A.2 DA24A.1 R57A.1 R81A.1 | length 5
  Top Layer w0.2: R57A.1@-22.7,47.5 -22.325,47.875 -21.85,47.875 -20.925,48.8 R81A.1@-20.7,48.8 -20.79,48.89 -20.79,49.69 C82A.2@-21,49.9 -21.05,49.95 DA24A.1@-22.25,49.95
NetC82B_2: C82B.2 DA24B.1 R57B.1 R81B.1 | length 5.1
  Top Layer w0.3: R57B.1@-23.1,17.8 -22.775,18.125 -22,18.125 -21.225,18.9 R81B.1@-21,18.9 C82B.2@-21,20.1 -21.025,20.075 -22.275,20.075 DA24B.1@-22.3,20.05
NetC86_2: C86.2 DD5.58 ZQ1.1 | length 7.5
  Top Layer w0.4: DD5.58@121.819,-9.714 123.244,-9.714 123.944,-10.414 C86.2@124.119,-10.414 127.424,-10.414 127.819,-10.809 ZQ1.1@127.819,-11.854
NetC88_2: C88.2 DD5.59 ZQ1.2 | length 7.5
  Top Layer w0.4: DD5.59@121.819,-8.914 121.894,-8.839 123.994,-8.839 C88.2@124.119,-8.714 127.238,-8.714 127.819,-8.133 ZQ1.2@127.819,-6.974
NetC123_1: C123.1 DA7.21 | length 2.7
  Top Layer w0.2: C123.1@3.654,-30.499 3.711,-30.555 4.054,-30.899 DA7.21@6.154,-30.899
NetC123_2: C123.2 DA7.22 DA7.23 DA7.24 DA7.25 DA7.26 DA7.27 DA7.28 L9.1 R59.2
NetC124_2: C124.2 R59.1 | length 1.4
  Top Layer w1: C124.2@-2.246,-31.044 R59.1@-0.889,-31.044
NetC130_1: C130.1 R63.2 | length 3.4
  Top Layer w0.2: R63.2@1.021,-24.639 1.021,-24.676 1.221,-24.877 1.258,-24.877 2.79,-26.409 2.79,-26.645 3.094,-26.949 C130.1@3.354,-26.949
NetC130_2: C130.2 DA7.18 | length 2.8
  Top Layer w0.2: C130.2@3.354,-28.949 DA7.18@6.004,-28.949 DA7.18@6.154,-28.949
NetC133_1: C133.1 DA7.13 R61.2 | length 4.8
  Top Layer w0.2: DA7.13@11.654,-27.649 DA7.13@11.804,-27.649 13.02,-27.649 13.825,-26.844 13.879,-26.844 13.897,-26.825 C133.1@13.897,-26.681 ; R61.2@13.675,-24.777 13.963,-25.065 13.963,-26.508 C133.1@14.089,-26.634
NetC134_2: C134.2 DA7.17 R62.2 | length 8.3
  Top Layer w0.2: R62.2@1.554,-22.599 1.554,-22.799 C134.2@3.954,-25.199 ; C134.2@3.954,-25.099 4.954,-26.099 4.954,-28.181 5.071,-28.299 DA7.17@6.004,-28.299 DA7.17@6.154,-28.299
NetC142_2: C142.2 R67.1 | length 1.7
  Top Layer w1: C142.2@21.744,-31.089 R67.1@23.444,-31.089
NetC143_1: C143.1 DA8.21 | length 3.1
  Top Layer w0.2: C143.1@27.444,-30.529 27.444,-30.899 DA8.21@30.144,-30.899
NetC143_2: C143.2 DA8.22 DA8.23 DA8.24 DA8.25 DA8.26 DA8.27 DA8.28 L10.1 R67.2
NetC144A_2: C144A.2 DA26A.1 L1A.2 | length 4.9
  Bottom Layer w0.5: DA26A.1@-34.8,38.6 C144A.2@-34.8,40.9 ; C144A.2@-34.8,41.075 -34.525,41.35 -34.45,41.35 -33.475,42.325 -33.325,42.325 -33,42.65 L1A.2@-33,42.8
NetC144B_2: C144B.2 DA26B.1 L1B.2 | length 5.2
  Bottom Layer w0.5: DA26B.1@-34.9,8.3 C144B.2@-34.9,10.7 -34.9,10.875 -34.625,11.15 -34.45,11.15 -33.475,12.125 -33.35,12.125 -33.1,12.375 L1B.2@-33.1,12.6
NetC148_1: C148.1 R69.2 | length 2.4
  Top Layer w0.2: R69.2@22.22,-26.397 22.24,-26.397 22.772,-26.929 C148.1@24.444,-26.929
NetC148_2: C148.2 C150.2 DA8.18 | length 6.4
  Top Layer w0.2: C148.2@24.444,-28.949 C148.2@24.424,-28.949 ; C148.2@24.644,-28.629 C148.2@24.344,-28.929 ; DA8.18@30.144,-28.949 DA8.18@29.994,-28.949 26.764,-28.949 26.744,-28.929 C148.2@24.444,-28.929 ; C148.2@24.344,-28.929 C148.2@24.444,-28.929 ; C148.2@24.344,-28.929 24.324,-28.949 C148.2@24.424,-28.949 ; C148.2@24.424,-28.949 C148.2@24.444,-28.929
NetC151_2: C151.2 DA8.17 R68.2 | length 7.5
  Top Layer w0.2: C151.2@26.631,-25.164 26.631,-25.339 27.056,-25.764 27.122,-25.764 28.944,-27.587 28.944,-28.126 29.061,-28.243 30.089,-28.243 DA8.17@30.144,-28.299 ; C151.2@26.744,-25.029 R68.2@26.744,-22.729
NetC195_2: C195.2 DD10.5 | length 2.4
  Top Layer w0.2: C195.2@-31.541,-35.086 -31.496,-35.041 DD10.5@-29.141,-35.041
NetC201_2: C201.2 DA21.7 R110.1 R111.2 | length 7.6
  Top Layer w0.2: R111.2@17.691,-22.906 C201.2@19.807,-22.906 ; C201.2@19.807,-23.044 19.876,-22.975 20.051,-22.975 20.407,-22.619 20.407,-22.583 21.576,-21.414 21.576,-21.185 R110.1@21.951,-20.81 ; DA21.7@20.191,-20.056 21.657,-20.056 21.811,-20.21 R110.1@21.959,-20.808
NetC202A_1: C202A.1 DA2A.4 R1A.2 R3A.1 R118A.2 | length 11.8
  Top Layer w0.3: C202A.1@-15.6,42.85 -15.4,42.65 -15.4,41.526 -15.224,41.35 -14.475,41.35 DA2A.4@-14.4,41.275 -14.325,41.2 -12.275,41.2 -10.8,39.725 R3A.1@-10.8,39.5 -10.8,39.275 -9.675,38.15 -9.125,38.15 -8.8,37.825 R1A.2@-8.8,37.6 ; C202A.1@-15.6,43 R118A.2@-13.8,43
NetC202B_1: C202B.1 DA2B.4 R1B.2 R3B.1 R118B.2 | length 11.7
  Top Layer w0.3: R118B.2@-14.6,14 C202B.1@-16.3,14 -15.9,13.6 -15.9,12.526 -15.724,12.35 -15.075,12.35 DA2B.4@-15,12.275 -14.925,12.2 -12.975,12.2 -11.5,10.725 R3B.1@-11.5,10.5 -11.5,10.275 -11.175,9.95 -10.95,9.95 -10.25,9.25 -9.825,9.25 -9.5,8.925 R1B.2@-9.5,8.7
NetC233A_2: C233A.2 C234A.2 IC8A.N14 L7A.1 | length 4
  Top Layer w0.3: v2(22.519,43.086) IC8A.N14@23.019,43.586
  Bottom Layer w0.3: L7A.1@20.319,44.086 20.581,44.348 21.49,44.348 21.567,44.426 21.727,44.266 21.727,43.812 21.874,43.665 21.924,43.665 21.999,43.59 21.999,43.437 22.311,43.124 22.481,43.124 v2(22.519,43.086)
NetC233B_2: C233B.2 C234B.2 IC8B.N14 L7B.1 | length 4.1
  Top Layer w0.3: v2(22.519,7.186) IC8B.N14@23.019,7.686
  Bottom Layer w0.3: L7B.1@20.244,8.222 20.506,8.485 21.415,8.485 21.492,8.562 21.652,8.402 21.652,7.948 C234B.2@21.799,7.802 ; C234B.2@21.824,7.802 21.849,7.802 21.924,7.727 21.924,7.44 22.14,7.224 22.454,7.224 22.492,7.186 v2(22.519,7.186)
NetC255_2: C255.2 D6.1 DA27.8
NetC318A_1: C318A.1 DA1A.7 R246A.1 | length 3.7
  Bottom Layer w0.3: R246A.1@-59.3,30.2 -59.3,31.799 -59.225,31.874 DA1A.7@-58.919,31.874 -58.844,31.799 -58.199,31.799 -57.978,31.578 -57.478,31.578 C318A.1@-57.4,31.5
NetC318A_2: C318A.2 DA1A.6 R245A.1 | length 4.7
  Bottom Layer w0.3: DA1A.6@-58.934,32.509 DA1A.6@-58.919,32.524 -57.524,32.524 -57.2,32.2 -56.976,32.2 -56.8,32.024 -56.8,31.101 -56.976,30.925 -57.125,30.925 -57.85,30.2 R245A.1@-57.9,30.2
NetC318B_1: C318B.1 DA1B.7 R246B.1 | length 3.8
  Bottom Layer w0.2: R246B.1@-59.2,0.1 -59.2,1.681 -59.075,1.806 -57.714,1.806 -57.568,1.66 -57.41,1.66 C318B.1@-57.2,1.45
NetC318B_2: C318B.2 DA1B.6 R245B.1 | length 9.2
  Bottom Layer w0.2: R245B.1@-57.8,0.1 -57.834,0.1 -58.184,-0.25 -58.184,-0.491 -58.587,-0.894 -60.206,-0.894 -60.475,-0.625 -60.475,1.544 -59.719,2.3 -59.555,2.3 -59.524,2.331 -58.938,2.331 DA1B.6@-58.813,2.456 -58.707,2.35 C318B.2@-57.2,2.35
NetD2_3: D2.3 R16.2 R18.2 R36.2 | length 4.7
  Top Layer w0.2: R18.2@-49.181,-71.554 R36.2@-48.081,-71.554 ; D2.3@-48.081,-73.814 R36.2@-48.081,-71.554 ; R16.2@-46.77,-71.6 -46.816,-71.554 R36.2@-48.081,-71.554
NetD3_3: D3.3 R78.2 R79.2 R82.2 | length 3.3
  Top Layer w0.3: D3.3@-7.581,-75.414 R79.2@-7.581,-74.154 R82.2@-6.581,-74.154 -6.527,-74.1 R78.2@-5.6,-74.1
NetD8A_3: D8A.3 DA6A.13 R232A.1 | length 3
  Top Layer w0.3: DA6A.13@-72.05,8.325 -72.04,8.315 -71.09,8.315 -70.6,7.825 R232A.1@-70.55,7.825 -70.35,8.025 D8A.3@-69.35,8.025
NetD8B_3: D8B.3 DA6B.13 R232B.1 | length 3.1
  Top Layer w0.4: DA6B.13@-71.95,23.325 -71.925,23.3 -70.821,23.3 -70.45,22.929 R232B.1@-70.4,22.929 -70.35,22.979 -69.15,22.979 D8B.3@-69.1,23.029
NetD8C_3: D8C.3 DA6C.13 R232C.1 | length 3.1
  Top Layer w0.4: DA6C.13@-71.95,38.825 -71.925,38.8 -70.821,38.8 -70.45,38.429 R232C.1@-70.4,38.429 -70.35,38.479 -69.15,38.479 D8C.3@-69.1,38.529
NetD8D_3: D8D.3 DA6D.13 R232D.1 | length 3.1
  Top Layer w0.4: DA6D.13@-72.118,53.293 -72.093,53.268 -70.989,53.268 -70.618,52.896 R232D.1@-70.568,52.896 -70.518,52.946 -69.318,52.946 D8D.3@-69.268,52.996
NetD9A_3: D9A.3 DA6A.5 R12A.1 | length 5.5
  Top Layer w0.3: R12A.1@-79.9,9.3 -79.6,9.6 -79.6,10.05 -78.15,11.5 D9A.3@-78,11.5 ; D9A.3@-77.85,11.5 -76.635,10.285 -75.96,10.285 DA6A.5@-75.95,10.275
NetD9B_3: D9B.3 DA6B.5 R12B.1 | length 5.5
  Top Layer w0.3: R12B.1@-79.8,24.3 -79.5,24.6 -79.5,25.05 -78.05,26.5 D9B.3@-77.9,26.5 ; D9B.3@-77.75,26.5 -76.535,25.285 -75.86,25.285 DA6B.5@-75.85,25.275
NetD9C_3: D9C.3 DA6C.5 R12C.1 | length 5.5
  Top Layer w0.3: R12C.1@-79.8,39.8 R12C.1@-79.796,39.804 -79.5,40.1 -79.5,40.55 -78.05,42 D9C.3@-77.9,42 ; D9C.3@-77.75,42 -76.535,40.785 -75.86,40.785 DA6C.5@-75.85,40.775
NetD9D_3: D9D.3 DA6D.5 R12D.1 | length 5.5
  Top Layer w0.3: R12D.1@-79.968,54.268 -79.668,54.568 -79.668,55.018 -78.218,56.468 D9D.3@-78.068,56.468 ; D9D.3@-77.918,56.468 -76.702,55.252 -76.027,55.252 DA6D.5@-76.018,55.243
NetD10A_3: D10A.3 DA15A.13 R25A.1 | length 3.3
  Top Layer w0.3: DA15A.13@-72.05,1.325 -71.814,1.325 -71.775,1.286 -71.775,1.275 -70.95,0.45 -70.95,0.4 -70.75,0.2 D10A.3@-69.25,0.2
NetD10B_3: D10B.3 DA15B.13 R25B.1 | length 3.1
  Top Layer w0.4: DA15B.13@-71.95,15.925 -71.925,15.9 -70.821,15.9 -70.45,15.529 R25B.1@-70.4,15.529 -70.35,15.579 -69.15,15.579 D10B.3@-69.1,15.629
NetD10C_3: D10C.3 DA15C.13 R25C.1 | length 3.2
  Top Layer w0.4: DA15C.13@-71.85,31.525 -71.65,31.525 -71.275,31.15 -70.55,31.15 R25C.1@-70.3,30.9 -70.05,31.15 -69.35,31.15 -69.2,31.3 D10C.3@-69.05,31.3
NetD10D_3: D10D.3 DA15D.13 R25D.1 | length 3.1
  Top Layer w0.4: DA15D.13@-71.95,46.125 -71.925,46.1 -70.821,46.1 R25D.1@-70.45,45.729 -70.4,45.729 -70.35,45.779 -69.15,45.779 D10D.3@-69.1,45.829
NetD11A_3: D11A.3 DA15A.5 R29A.1 | length 5.6
  Top Layer w0.3: R29A.1@-79.9,2.3 -79.624,2.576 -79.624,3.247 -79.331,3.54 -79.11,3.54 -78.15,4.5 D11A.3@-78,4.5 ; D11A.3@-77.85,4.5 -76.635,3.285 -75.96,3.285 DA15A.5@-75.95,3.275
NetD11B_3: D11B.3 DA15B.5 R29B.1 | length 5.5
  Top Layer w0.3: R29B.1@-79.8,16.9 -79.5,17.2 -79.5,17.65 -78.05,19.1 D11B.3@-77.9,19.1 ; D11B.3@-77.75,19.1 -76.535,17.885 -75.86,17.885 DA15B.5@-75.85,17.875
NetD11C_3: D11C.3 DA15C.5 R29C.1 | length 5.5
  Top Layer w0.3: R29C.1@-79.7,32.5 -79.4,32.8 -79.4,33.25 -77.95,34.7 D11C.3@-77.8,34.7 ; D11C.3@-77.65,34.7 -76.435,33.485 -75.76,33.485 DA15C.5@-75.75,33.475
NetD11D_3: D11D.3 DA15D.5 R29D.1 | length 5.5
  Top Layer w0.3: R29D.1@-79.8,47.1 -79.5,47.4 -79.5,47.85 -78.05,49.3 D11D.3@-77.9,49.3 ; D11D.3@-77.75,49.3 -76.535,48.085 -75.86,48.085 DA15D.5@-75.85,48.075
NetDA1A_2: DA1A.2 R41A.1 R45xA.2 | length 6
  Bottom Layer w0.3: R45xA.2@-60.8,37.6 -60.7,37.5 -60.7,35.5 -60.324,35.124 DA1A.2@-58.919,35.124 -57.024,35.124 R41A.1@-57,35.1
NetDA1A_5: DA1A.5 R247A.1 R248A.2 | length 5.8
  Bottom Layer w0.3: DA1A.5@-58.919,33.174 -58.844,33.099 -58.197,33.099 -58.168,33.07 -55.795,33.07 -55.125,32.4 R247A.1@-54.9,32.4 -55,32.5 R248A.2@-55,33.8
NetDA1A_9: DA1A.9 R31A.1 R34A.2 | length 6.1
  Bottom Layer w0.3: R31A.1@-66.8,32.4 -66.676,32.524 DA1A.9@-64.819,32.524 -63.824,32.524 -63.5,32.2 -63.5,31.5 -64.25,30.75 -64.375,30.75 -64.7,30.425 R34A.2@-64.7,30.2
NetDA1A_12: DA1A.12 R121xA.2 R122xA.2 | length 5.8
  Bottom Layer w0.3: R122xA.2@-66.8,35.8 -66.575,35.8 -66.3,36.075 -66.3,36.9 -65.7,37.5 R121xA.2@-64.8,37.5 ; R122xA.2@-66.676,35.8 -66.351,35.475 -66.351,35.051 -65.79,34.49 -64.835,34.49 DA1A.12@-64.819,34.474
NetDA1B_2: DA1B.2 R41B.1 R45xB.2 | length 5.7
  Bottom Layer w0.3: R45xB.2@-60.5,7.3 -60.5,5.5 -60.056,5.056 DA1B.2@-58.813,5.056 -58.769,5.1 R41B.1@-56.8,5.1
NetDA1B_5: DA1B.5 R247B.1 R248B.2 | length 6
  Bottom Layer w0.2: DA1B.5@-58.813,3.106 -55.606,3.106 -55.4,2.9 -55.4,2.675 -55.025,2.3 R247B.1@-54.8,2.3 -54.9,2.4 R248B.2@-54.9,3.8
NetDA1B_9: DA1B.9 R31B.1 R34B.2 | length 6.1
  Bottom Layer w0.3: R31B.1@-66.8,2.5 -64.757,2.5 DA1B.9@-64.713,2.456 -64.649,2.391 -63.791,2.391 -63.6,2.2 -63.6,0.8 -63.851,0.549 -64.275,0.549 -64.6,0.224 R34B.2@-64.6,0.1
NetDA1B_12: DA1B.12 R121xB.2 R122xB.2 | length 5.8
  Bottom Layer w0.3: R122xB.2@-66.8,5.9 -66.575,5.9 -66.25,6.225 -66.25,6.45 -65.85,6.85 -65.025,6.85 -64.7,7.175 R121xB.2@-64.7,7.4 ; R122xB.2@-66.676,5.9 -66.351,5.575 -66.351,5.151 -65.653,4.453 -64.76,4.453 DA1B.12@-64.713,4.406
NetDA7_12: DA7.12 R60.1 R64.2 | length 6.6
  Top Layer w0.2: R64.2@9.69,-22.949 10.154,-23.413 10.154,-27.629 10.824,-28.299 DA7.12@11.654,-28.299
NetDA7_15: DA7.15 R65.2 | length 1.9
  Top Layer w0.2: DA7.15@6.154,-26.999 R65.2@6.154,-25.099
NetDA8_12: DA8.12 R70.2 R71.2 | length 7.4
  Top Layer w0.2: R70.2@34.744,-24.629 33.244,-24.629 33.244,-28.031 33.511,-28.299 DA8.12@35.644,-28.299
NetDA8_15: DA8.15 R72.2 | length 2.2
  Top Layer w0.2: R72.2@29.086,-25.337 29.311,-25.337 29.686,-25.712 29.686,-25.744 29.994,-26.052 DA8.15@29.994,-26.999
NetDA27_1: DA27.1 R101.2 | length 1.5
  Bottom Layer w0.5: R101.2@-41.981,-18.314 -40.474,-18.314 DA27.1@-40.469,-18.319
NetDA27_2: DA27.2 R100.2 | length 1.5
  Bottom Layer w0.5: R100.2@-41.981,-17.014 -40.504,-17.014 DA27.2@-40.469,-17.049
NetDA27_3: DA27.3 R99.2 | length 1.5
  Bottom Layer w0.5: R99.2@-41.981,-15.814 -40.504,-15.814 DA27.3@-40.469,-15.779
NetDA27_4: DA27.4 R102.2 | length 1.5
  Bottom Layer w0.5: R102.2@-41.981,-14.514 -40.474,-14.514 DA27.4@-40.469,-14.509
NetDD1A_6: DD1A.6 R76A.1 | length 1.8
  Top Layer w0.145: DD1A.6@-6.8,42.575 -6.742,42.517 -5.317,42.517 R76A.1@-5.1,42.3
NetDD1A_7: DD1A.7 R74A.1 | length 1.7
  Top Layer w0.1: DD1A.7@-6.8,43.225 -5.175,43.225 R74A.1@-5.1,43.3
NetDD1B_6: DD1B.6 R76B.1 | length 1.7
  Top Layer w0.3: DD1B.6@-7.458,13.381 -7.383,13.306 -6.186,13.306 -5.9,13.02 R76B.1@-5.9,13
NetDD1B_7: DD1B.7 R74B.1 | length 1.6
  Top Layer w0.3: DD1B.7@-7.458,14.031 -7.443,14.015 -5.915,14.015 R74B.1@-5.9,14
NetDD3_30: DD3.30 R28.2 | length 1.7
  Top Layer w0.3: R28.2@78.328,-14.671 DD3.30@79.999,-14.671
NetDD10_3: DD10.3 R66.2 R73.1 | length 6.7
  Top Layer w0.2: DD10.3@-24.141,-36.311 -22.071,-36.311 -22.041,-36.341 -22.041,-34.059 -23.105,-32.995 R73.1@-23.871,-32.995
NetDD13_6: DD13.6 DD13.10 | length 5.9
  Top Layer w0.2: DD13.10@-62.527,-7.724 -62.527,-10.094 -61.257,-11.364 DD13.6@-61.257,-13.124
NetDD14A_4: DD14A.4 R17A.1 | length 1.3
  Bottom Layer w0.4: DD14A.4@-87.6,6.8 R17A.1@-86.3,6.8
NetDD14B_4: DD14B.4 R17B.1 | length 1.3
  Bottom Layer w0.3: DD14B.4@-87.6,24.65 -86.55,24.65 R17B.1@-86.4,24.8
NetDD14C_4: DD14C.4 R17C.1 | length 1.5
  Bottom Layer w0.3: DD14C.4@-87.5,36.05 -86.05,36.05 R17C.1@-86,36.1
NetDD14D_4: DD14D.4 R17D.1 | length 1.5
  Bottom Layer w0.2: DD14D.4@-87.4,56.05 -85.95,56.05 R17D.1@-85.9,56.1
NetDD16A_4: DD16A.4 R35A.1 | length 1.3
  Bottom Layer w0.4: DD16A.4@-87.6,4.2 R35A.1@-86.3,4.2
NetDD16B_4: DD16B.4 R35B.1 | length 1.3
  Bottom Layer w0.3: DD16B.4@-87.6,22.15 -86.35,22.15 R35B.1@-86.3,22.2
NetDD16C_4: DD16C.4 R35C.1 | length 1.5
  Bottom Layer w0.3: DD16C.4@-87.5,33.35 -86.05,33.35 R35C.1@-86,33.4
NetDD16D_4: DD16D.4 R35D.1 | length 1.5
  Bottom Layer w0.2: DD16D.4@-87.4,53.45 -85.95,53.45 R35D.1@-85.9,53.4
NetDD20A_4: DD20A.4 R54A.1 | length 1.3
  Bottom Layer w0.3: DD20A.4@-26.9,53.85 -25.65,53.85 R54A.1@-25.6,53.8
NetDD20B_4: DD20B.4 R54B.1 | length 1.5
  Bottom Layer w0.2: DD20B.4@-27.1,23.45 -26.05,23.45 R54B.1@-25.7,23.8
NetDD31_4: DD31.4 R163.1 | length 1.8
  Top Layer w0.15: R163.1@94.419,-7.414 94.469,-7.464 DD31.4@96.169,-7.464
NetIC3_3: IC3.3 R18.1 | length 1.7
  Top Layer w0.2: R18.1@-49.181,-70.614 -49.161,-70.614 -48.971,-70.424 -48.971,-70.404 -48.803,-70.236 IC3.3@-48.803,-69.077
NetIC3_4: IC3.4 R36.1 | length 1.6
  Top Layer w0.2: IC3.4@-48.165,-69.077 -48.165,-69.39 -48.081,-69.474 R36.1@-48.081,-70.614
NetIC3_6: IC3.6 IC3.18 R40.1 R43.2 | length 17.3
  Top Layer w0.2: IC3.18@-47.503,-63.152 -47.503,-62.411 v1(-47.492,-62.4) ; IC3.6@-46.845,-69.077 -46.845,-70.35 R43.2@-46.781,-70.414 -46.591,-70.604 -46.591,-70.809 -46.4,-71 v1(-44.968,-71) -42.127,-71 -41.991,-70.864 -41.991,-70.844 -41.801,-70.654 R40.1@-41.781,-70.654
  Bottom Layer w0.2: v1(-47.492,-62.4) -46.4,-63.492 -46.4,-69.568 v1(-44.968,-71)
NetIC3_11: IC3.11 IC3.12 | length 2.1
  Top Layer w0.3: IC3.11@-45.515,-66.439 -45.49,-66.414 -44.876,-66.414 -44.7,-66.238 -44.7,-65.965 -44.851,-65.814 -45.49,-65.814 IC3.12@-45.515,-65.789
NetIC3_24: IC3.24 IC3.31 R56.1 R58.2 | length 3.2
  Top Layer w0.2: R58.2@-53.881,-63.814 R56.1@-52.981,-63.814 -52.956,-63.839 IC3.24@-51.44,-63.839 ; v1(-52.2,-68.4) -52.189,-68.389 IC3.31@-51.44,-68.389
NetIC4_3: IC4.3 R79.1 | length 2
  Top Layer w0.3: IC4.3@-7.806,-71.365 -7.806,-72.989 -7.741,-73.054 -7.741,-73.074 -7.601,-73.214 R79.1@-7.581,-73.214
NetIC4_4: IC4.4 R82.1 | length 2.1
  Top Layer w0.3: IC4.4@-7.169,-71.365 -7.169,-72.331 -6.741,-72.759 -6.741,-73.074 -6.601,-73.214 R82.1@-6.581,-73.214
NetIC4_6: IC4.6 R88.1 R90.2 | length 5
  Top Layer w0.3: IC4.6@-5.848,-71.365 -5.848,-72.352 -5.446,-72.754 R90.2@-2.881,-72.754 R88.1@-1.981,-72.754
NetIC4_18: IC4.18 R85.1 R86.2 | length 6.1
  Top Layer w0.3: IC4.18@-6.506,-65.44 -6.5,-65.433 -6.5,-64 -6.074,-63.574 R86.2@-2.981,-63.574 R85.1@-1.981,-63.574
NetIC4_24: IC4.24 R96.1 R98.2 | length 2.8
  Top Layer w0.15: R96.1@-12.081,-64.054 -12.081,-65.074 R98.2@-11.981,-65.174 ; R98.2@-11.961,-65.174 -11.746,-65.389 -11.746,-65.409 -11.069,-66.086 -10.799,-66.086 IC4.24@-10.758,-66.127
NetIC4_31: IC4.31 R93.1 R94.2 | length 2.7
  Top Layer w0.3: R93.1@-11.881,-72.174 R94.2@-11.881,-71.114 -11.861,-71.114 -11.721,-70.974 -11.721,-70.954 -11.481,-70.714 -11.467,-70.714 -11.43,-70.677 IC4.31@-10.444,-70.677
NetIC6A_35: IC6A.35 R8A.2 | length 2.4
  Top Layer w0.2: v1(-46.2,31) -46.161,31.039 -45.861,31.039 -45.727,31.173 IC6A.35@-45.727,32.106
  Bottom Layer w0.08: R8A.2@-46.3,31.9 -46.2,31.8 v1(-46.2,31)
NetIC6A_36: IC6A.36 R15A.2 | length 1.6
  Top Layer w0.2: IC6A.36@-45.227,32.106 -45.227,31.227 v1(-45.2,31.2)
  Bottom Layer w0.08: v1(-45.2,31.2) R15A.2@-45.2,31.9
NetIC6A_37: IC6A.37 R14A.2 | length 1.7
  Top Layer w0.2: IC6A.37@-44.727,32.106 -44.727,31.567 -44.46,31.3 v1(-44.4,31.3)
  Bottom Layer w0.08: v1(-44.4,31.3) -44.37,31.33 -44.37,31.65 -44.12,31.9 R14A.2@-44.1,31.9
NetIC6B_35: IC6B.35 R8B.2 | length 1.9
  Top Layer w0.2: v1(-45.869,1.446) -45.869,1.527 -45.747,1.65 -45.747,2.287 IC6B.35@-45.727,2.306
  Bottom Layer w0.2: R8B.2@-46.1,2.33 -46.08,2.33 -45.89,2.14 -45.89,1.467 v1(-45.869,1.446)
NetIC6B_36: IC6B.36 R15B.2 | length 2.7
  Top Layer w0.2: v1(-45.393,1.082) -45.393,1.646 -45.247,1.792 -45.247,2.287 IC6B.36@-45.227,2.306
  Bottom Layer w0.2: v1(-45.393,1.082) -45.393,1.649 -45.31,1.732 -45.31,2.14 -45.12,2.33 R15B.2@-45.1,2.33
NetIC6B_37: IC6B.37 R14B.2 | length 2
  Top Layer w0.2: v1(-44.9,1.501) -44.9,1.583 -44.747,1.736 -44.747,2.287 IC6B.37@-44.727,2.306
  Bottom Layer w0.2: v1(-44.9,1.501) -44.9,1.55 -44.12,2.33 R14B.2@-44.1,2.33
NetIC7A_35: IC7A.35 R32A.2 | length 3
  Top Layer w0.2: v1(-46.108,42.835) -45.747,43.197 -45.747,44.137 IC7A.35@-45.727,44.156
  Bottom Layer w0.2: v1(-46.108,42.835) -46.108,42.907 -45.826,43.189 -45.826,43.95 -45.636,44.14 R32A.2@-45.616,44.14
NetIC7A_36: IC7A.36 R53A.2 | length 2.3
  Top Layer w0.2: IC7A.36@-45.227,44.156 -45.208,44.137 -45.208,43.447 -44.992,43.23 v1(-44.992,43.149)
  Bottom Layer w0.2: v1(-44.992,43.149) -44.992,43.23 -44.826,43.396 -44.826,43.95 -44.636,44.14 R53A.2@-44.616,44.14
NetIC7A_37: IC7A.37 R55A.2 | length 2.5
  Top Layer w0.2: IC7A.37@-44.727,44.156 -44.723,44.152 -44.723,43.623 -44.339,43.239 -44.039,43.239 v1(-44,43.2)
  Bottom Layer w0.2: v1(-44,43.2) -44,43.281 -43.826,43.455 -43.826,43.95 -43.636,44.14 R55A.2@-43.616,44.14
NetIC7B_35: IC7B.35 R32B.2 | length 2.9
  Top Layer w0.2: v1(-46.2,13) -45.747,13.453 -45.747,14.337 IC7B.35@-45.727,14.356
  Bottom Layer w0.2: v1(-46.2,13) -46.2,14.23 R32B.2@-46.1,14.33
NetIC7B_36: IC7B.36 R53B.2 | length 1.7
  Top Layer w0.2: IC7B.36@-45.227,14.356 -45.208,14.337 -45.208,13.508 v1(-45.2,13.5)
  Bottom Layer w0.2: v1(-45.2,13.5) R53B.2@-45.2,14.33
NetIC7B_37: IC7B.37 R55B.2 | length 2.1
  Top Layer w0.2: IC7B.37@-44.727,14.356 -44.708,14.337 -44.708,13.708 -44.5,13.5 v1(-44.2,13.5)
  Bottom Layer w0.2: R55B.2@-44.3,14.33 -44.2,14.23 v1(-44.2,13.5)
NetIC8A_A12: IC8A.A12 TP6A.1 | length 3.1
  Top Layer w0.145: v2(24.519,31.086) IC8A.A12@25.019,31.586
  Bottom Layer w0.145: v2(24.519,31.086) 25.063,31.63 TP6A.1@25.063,33.224
NetIC8A_A13: IC8A.A13 TP5A.1 | length 4.9
  Top Layer w0.145: v2(23.519,31.086) IC8A.A13@24.019,31.586
  Bottom Layer w0.145: TP5A.1@19.919,32.586 21.119,32.586 22.619,31.086 v2(23.519,31.086)
NetIC8A_J18: IC8A.J18 TP4A.1 | length 3.9
  Top Layer w0.145: v2(18.519,39.086) IC8A.J18@19.019,39.586
  Bottom Layer w0.145: TP4A.1@16.919,36.586 16.919,37.526 18.479,39.086 v2(18.519,39.086)
NetIC8A_V18: IC8A.V18 TP3A.1 | length 5.7
  Top Layer w0.145: v2(18.519,49.086) IC8A.V18@19.019,48.586
  Bottom Layer w0.145: TP3A.1@14.447,46.825 15.009,47.388 15.059,47.388 15.467,47.796 15.702,47.796 16.62,48.713 16.895,48.713 17.268,49.086 v2(18.519,49.086)